# EAGLE board breakout (EAGLE 7.2.0)
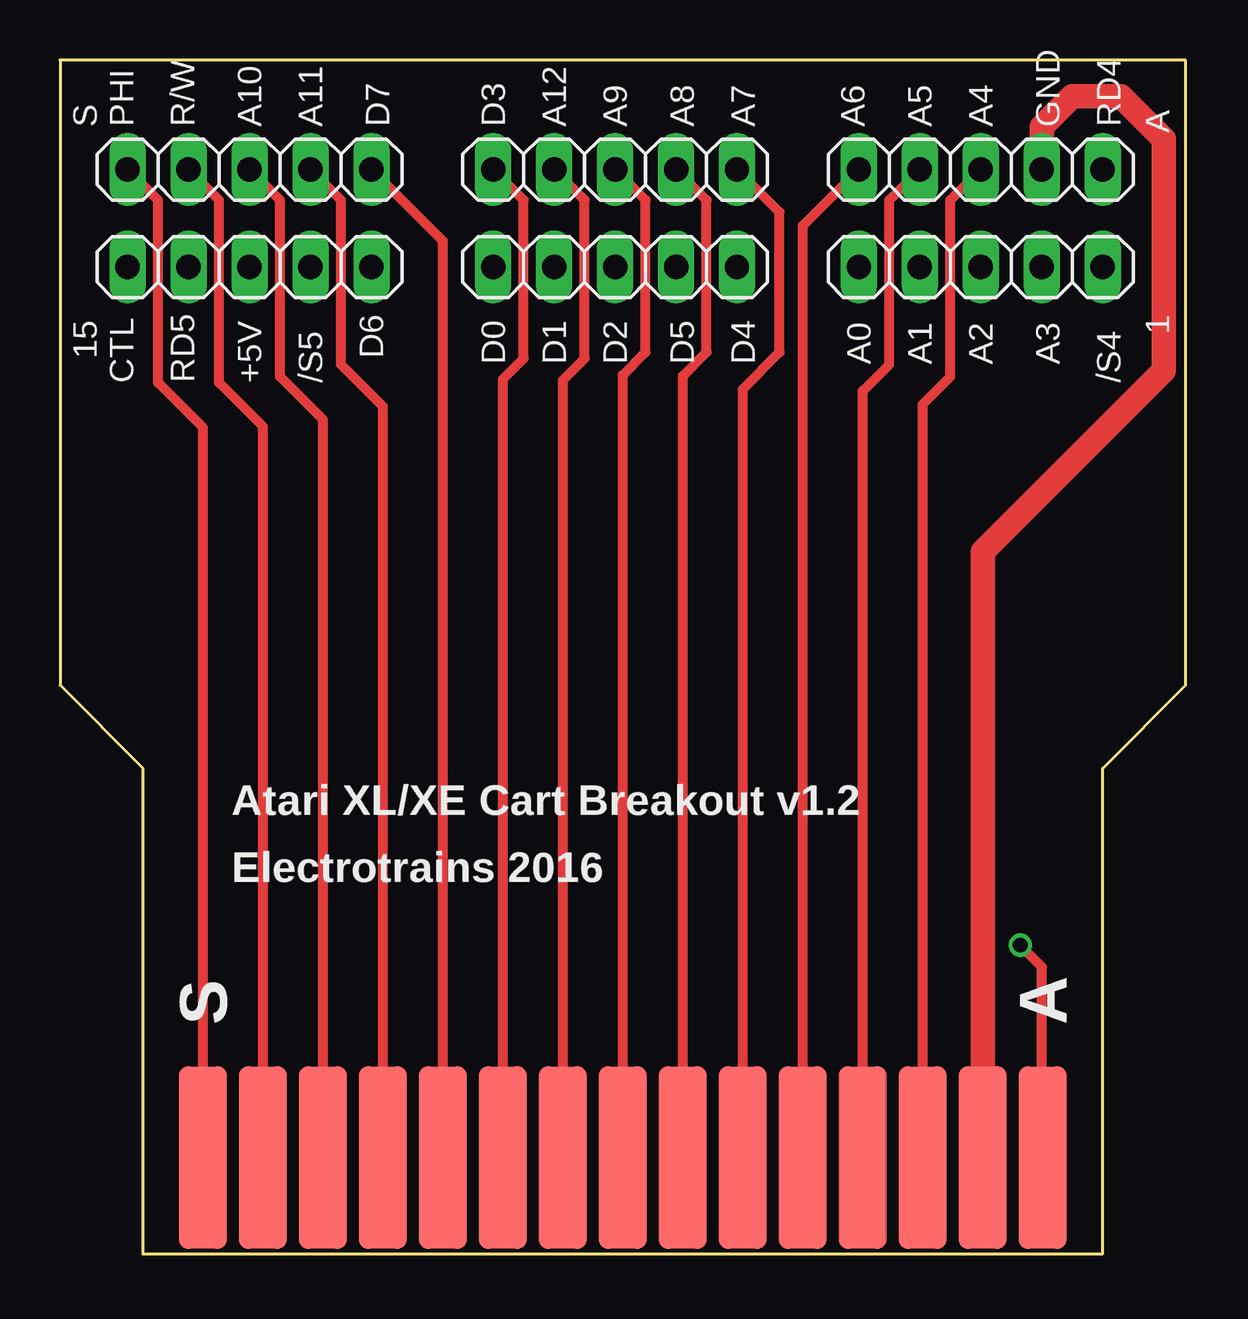
[diagram p0: board, top side]
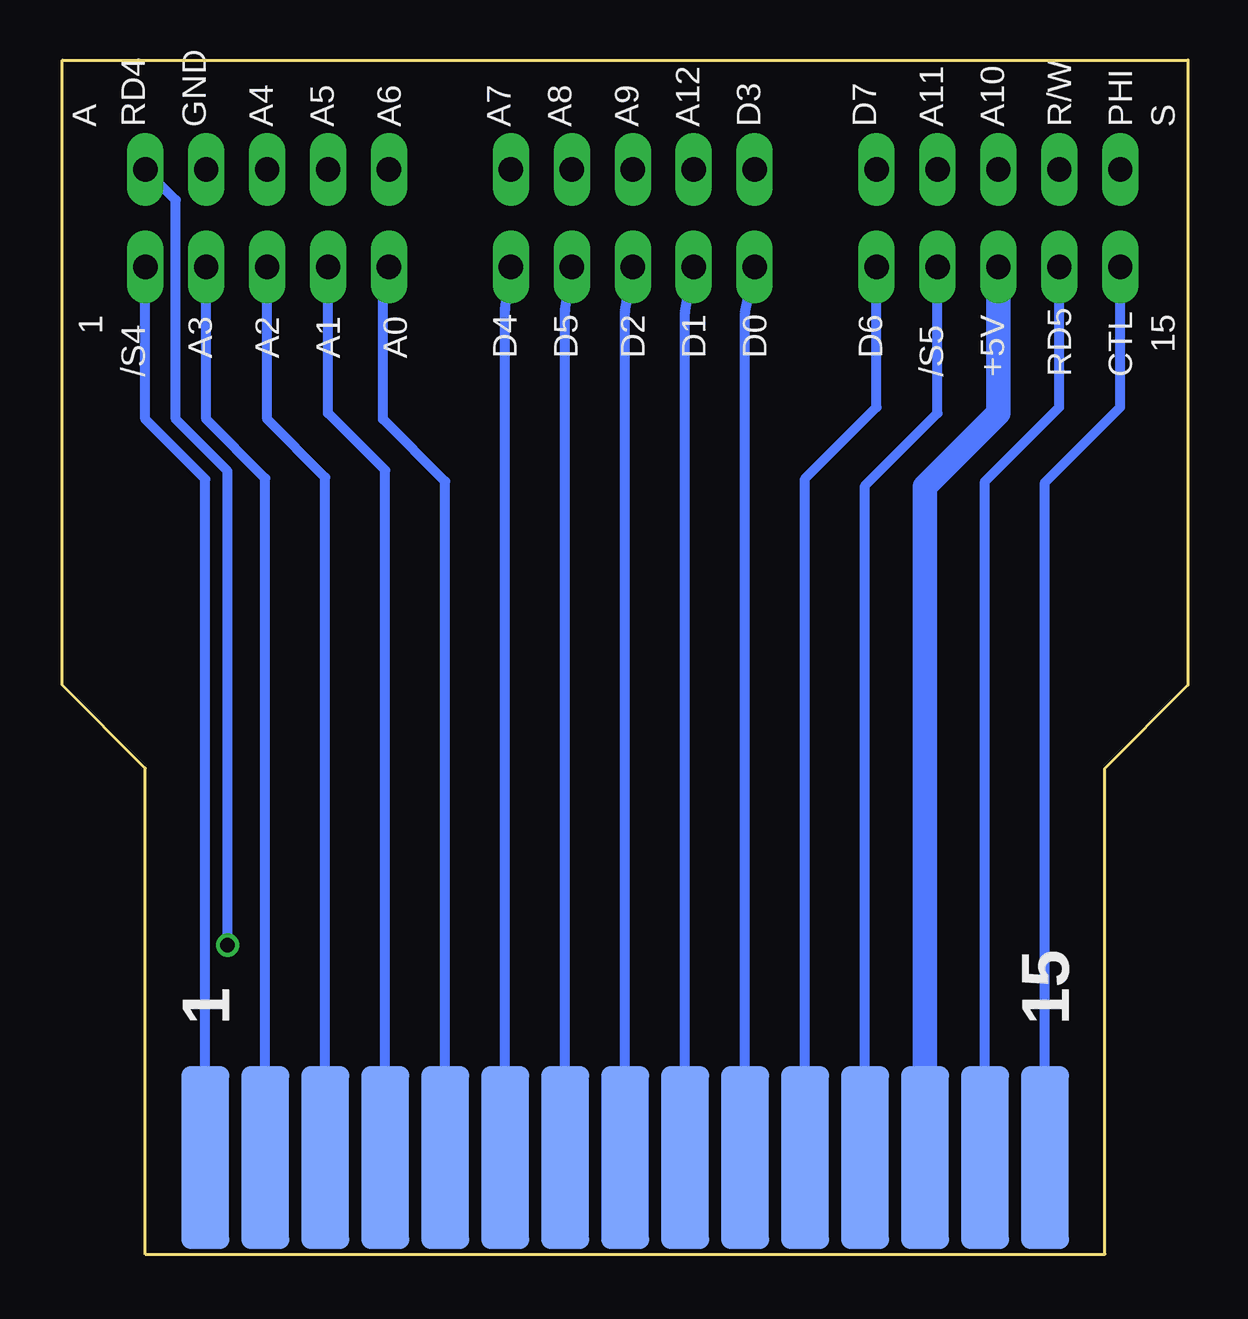
[diagram p1: board, bottom side, seen from below]

Size 46.92 x 49.78 mm. Coordinates in mm from the lower left corner, seen from the top.
Copper layers (1*16): Top 0.0356mm / dielectric 1.5011mm / Bottom 0.0356mm
Design rules "OSHPark2layer": minimum track width 6mil, minimum drill 13mil, track to track 6mil, track to pad 6mil, pad to pad 6mil, via to via 6mil, smd to smd 6mil, copper to edge 15mil, drill to drill 6mil, minimum pad ring 7mil, minimum via ring 7mil, stop-mask expansion 3mil, vias tented up to drill 0mil, thermal gap 10mil

## Footprints (pad centres in the part's own frame; a part is rotated, then mirrored left to right if it is on the bottom)
CART_SMALL = smd 2 x 7.62: 1 -17.82,-27.98; 2 -15.32,-27.98; 3 -12.82,-27.98; 4 -10.32,-27.98; 5 -7.82,-27.98; 6 -5.32,-27.98; 7 -2.82,-27.98; 8 -0.32,-27.98; 9 2.18,-27.98; 10 4.68,-27.98; 11 7.18,-27.98; 12 9.68,-27.98; 13 12.18,-27.98; 14 14.68,-27.98; 15 17.18,-27.98 | smd 2 x 7.62 bottom: A -17.82,-27.98; B -15.32,-27.98; C -12.82,-27.98; D -10.32,-27.98; E -7.82,-27.98; F -5.32,-27.98; H -2.82,-27.98; J -0.32,-27.98; K 2.18,-27.98; L 4.68,-27.98; M 7.18,-27.98; N 9.68,-27.98; P 12.18,-27.98; R 14.68,-27.98; S 17.18,-27.98
1X05 = drill 1.016 long: 1 -5.08,0; 2 -2.54,0; 3 0,0; 4 2.54,0; 5 5.08,0

## Placement (x,y rotation side)
CART1  CARTRIDGESMALL_PCB  [CART_SMALL]  23.14,32 0 bottom
JP1  [1X05]  38.38,45.21 180 top
JP2  [1X05]  23.14,45.21 180 top
JP3  [1X05]  7.9,45.21 180 top
JP4  [1X05]  38.38,41.15 180 top
JP5  [1X05]  23.14,41.15 180 top
JP6  [1X05]  7.9,41.15 180 top

## Library data of the parts
CART1 = eagle-6.5.0-atari
JP1-JP6 = pinhead

## Nets
N$1: CART1.A JP1.1
N$2: CART1.B JP1.2
N$3: CART1.C JP1.3
N$4: CART1.D JP1.4
N$5: CART1.E JP1.5
N$6: CART1.F JP2.1
N$7: CART1.H JP2.2
N$8: CART1.J JP2.3
N$9: CART1.K JP2.4
N$10: CART1.L JP2.5
N$11: CART1.M JP3.1
N$12: CART1.N JP3.2
N$13: CART1.P JP3.3
N$14: CART1.R JP3.4
N$15: CART1.S JP3.5
N$16: CART1.1 JP4.1
N$17: CART1.2 JP4.2
N$18: CART1.3 JP4.3
N$19: CART1.4 JP4.4
N$20: CART1.5 JP4.5
N$21: CART1.6 JP5.1
N$22: CART1.7 JP5.2
N$23: CART1.8 JP5.3
N$24: CART1.9 JP5.4
N$25: CART1.10 JP5.5
N$26: CART1.11 JP6.1
N$27: CART1.12 JP6.2
N$28: CART1.13 JP6.3
N$29: CART1.14 JP6.4
N$30: CART1.15 JP6.5

## Tracks (layer width: path | path; a pad name or v marks a point on that pad's centre or on a via)
N$1  (via drill 0.61)
  Top 0.254: 40.95,11.96 40.92,11.94
  Top 0.406: CART1.A 40.92,4.02 40.92,11.94 | 40.95,11.96 v40.03,12.88
  Bottom 0.406: v40.03,12.88 40.03,32.64 42.19,34.8 42.19,43.94 JP1.1
N$2
  Top 1.016: CART1.B 38.46,29.29 46,36.83 46,46.48 44.22,48.26 42.19,48.26 40.92,46.99 JP1.2
N$3
  Top 0.406: CART1.C 35.96,35.43 37.11,36.58 37.11,43.94 JP1.3
N$4
  Top 0.406: CART1.D 33.46,35.97 34.57,37.08 34.57,43.94 JP1.4
N$5
  Top 0.406: CART1.E 30.96,42.87 JP1.5
N$6
  Top 0.406: CART1.F 28.46,36.05 30,37.59 30,43.43 JP2.1
N$7
  Top 0.406: CART1.H 25.96,36.6 26.95,37.59 26.95,43.94 JP2.2
N$8
  Top 0.406: CART1.J 23.46,36.64 24.41,37.59 24.41,43.94 JP2.3
N$9
  Top 0.406: CART1.K 20.96,36.43 21.87,37.34 21.87,43.94 JP2.4
N$10
  Top 0.406: CART1.L 18.46,36.47 19.33,37.34 19.33,43.94 JP2.5
N$11
  Top 0.406: CART1.M 15.96,42.23 JP3.1
N$12
  Top 0.406: CART1.N 13.46,35.33 11.71,37.08 11.71,43.94 JP3.2
N$13
  Top 0.406: CART1.P 10.96,34.79 9.17,36.58 9.17,43.94 JP3.3
N$14
  Top 0.406: CART1.R 8.46,34.49 6.63,36.32 6.63,43.94 JP3.4
N$15
  Top 0.406: CART1.S 5.96,34.45 4.09,36.32 4.09,43.94 JP3.5
N$16
  Bottom 0.406: CART1.1 40.96,32.3 43.46,34.8 JP4.1
N$17
  Bottom 0.406: CART1.2 38.46,32.34 40.92,34.8 JP4.2
N$18
  Bottom 0.406: CART1.3 35.96,32.38 38.38,34.8 JP4.3
N$19
  Bottom 0.406: CART1.4 33.46,32.67 35.84,35.05 JP4.4
N$20
  Bottom 0.406: CART1.5 30.96,32.2 33.55,34.8 33.55,40.89 JP4.5
N$21
  Bottom 0.406: CART1.6 28.46,39.38 JP5.1
N$22
  Bottom 0.406: CART1.7 25.96,39.34 JP5.2
N$23
  Bottom 0.406: CART1.8 23.46,39.3 JP5.3
N$24
  Bottom 0.406: CART1.9 20.96,39.26 JP5.4
N$25
  Bottom 0.406: CART1.10 18.46,39.22 JP5.5
N$26
  Bottom 0.406: CART1.11 15.96,32.33 12.98,35.31 JP6.1
N$27
  Bottom 0.406: CART1.12 13.46,32.03 10.44,35.05 JP6.2
N$28
  Bottom 1.016: CART1.13 10.96,31.99 7.9,35.05 JP6.3
N$29
  Bottom 0.406: CART1.14 8.46,32.21 5.36,35.31 JP6.4
N$30
  Bottom 0.406: CART1.15 5.96,32.17 2.82,35.31 JP6.5

## Text on the board
tPlace: S | PHI | R/W | A10 | A11 | D7 | D3 | A12 | A9 | A8 | A7 | A6 | A5 | A4 | GND | RD4 | A | 1 | 15 | D6 | D0 | D1 | D2 | D5 | D4 | A0 | A1 | A2 | A3 | CTL | RD5 | +5V | /S5 | /S4 | Atari XL/XE Cart Breakout v1.2 | Electrotrains 2016
bPlace: S | PHI | R/W | A10 | A11 | D7 | D3 | A12 | A9 | A8 | A7 | A6 | A5 | A4 | GND | RD4 | A | 1 | 15 | D6 | D0 | D1 | D2 | D5 | D4 | A0 | A1 | A2 | A3 | CTL | RD5 | +5V | /S5 | /S4